# Altium PCB PCB3.PcbDoc
Units mil, origin at the board's own origin, x right, y up, seen from the top; angles counter-clockwise.
Board outline 2000 x 3000 mil, 4 copper layers (Top Layer, Layer 1, Layer 2, Bottom Layer), stack 62.192 mil thick; 42 components, 43 nets, 194 pads, 50 vias.
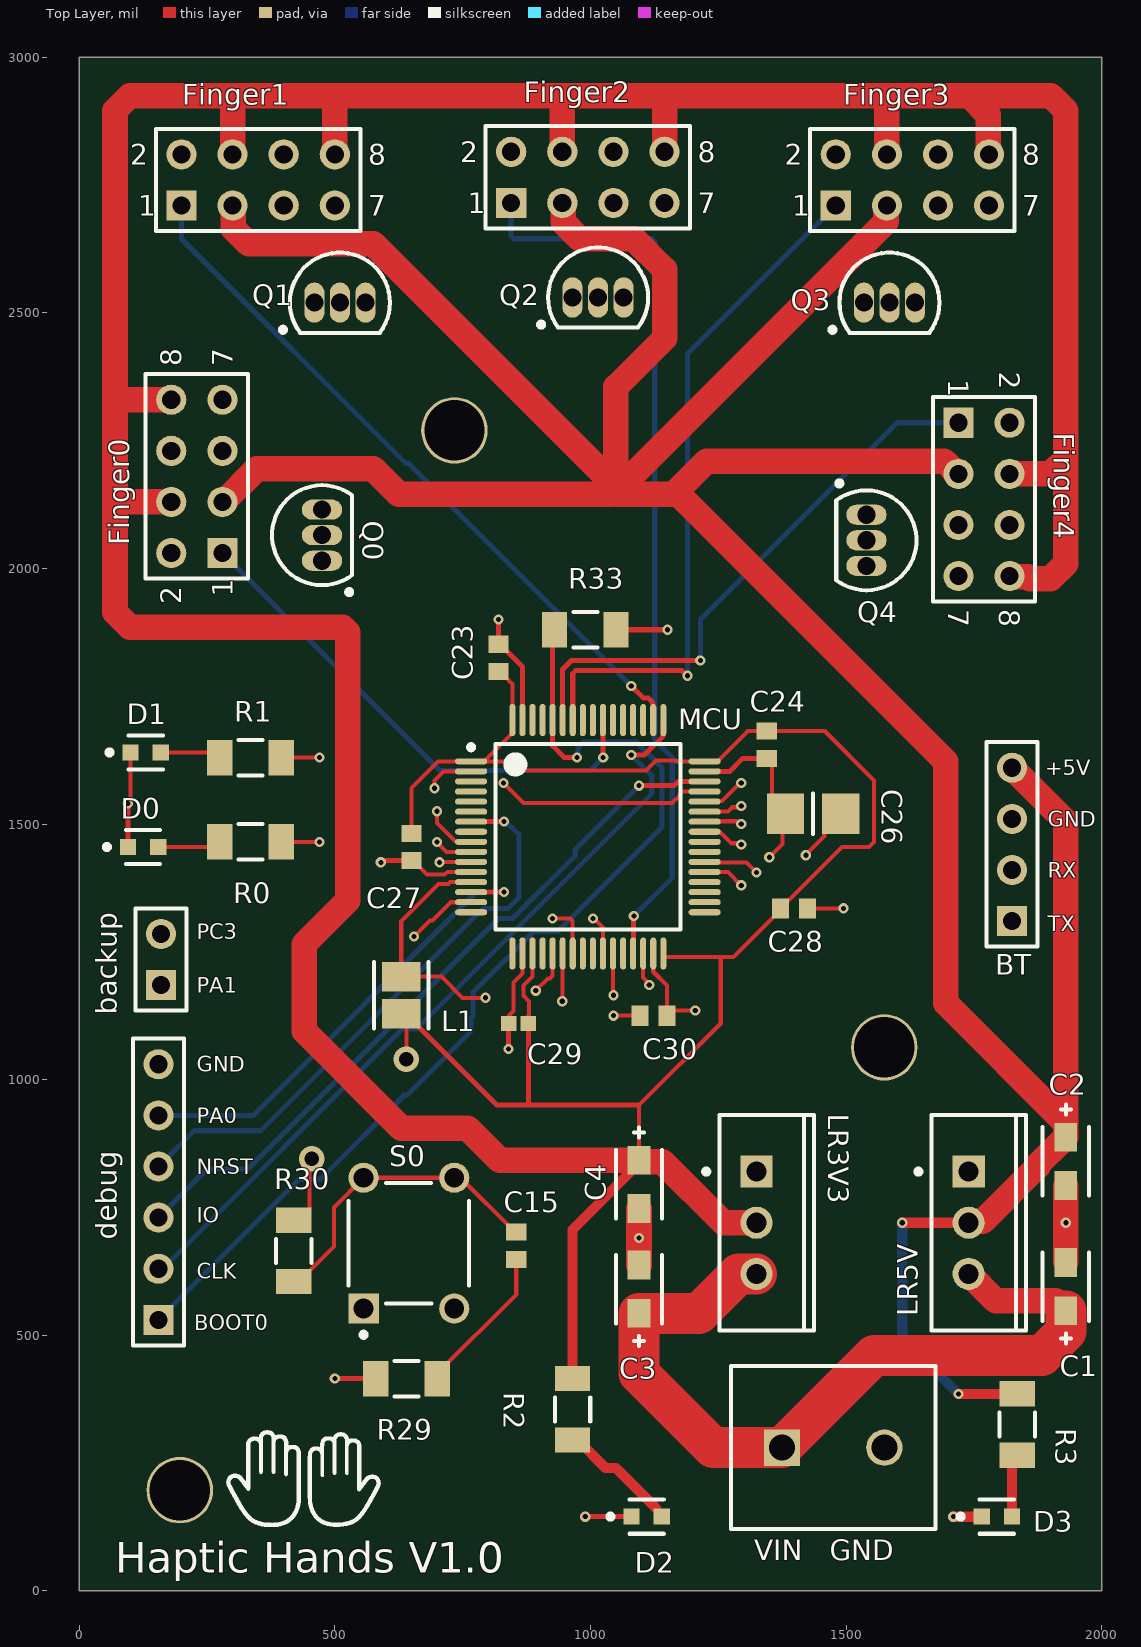
[diagram p0: Top Layer view]
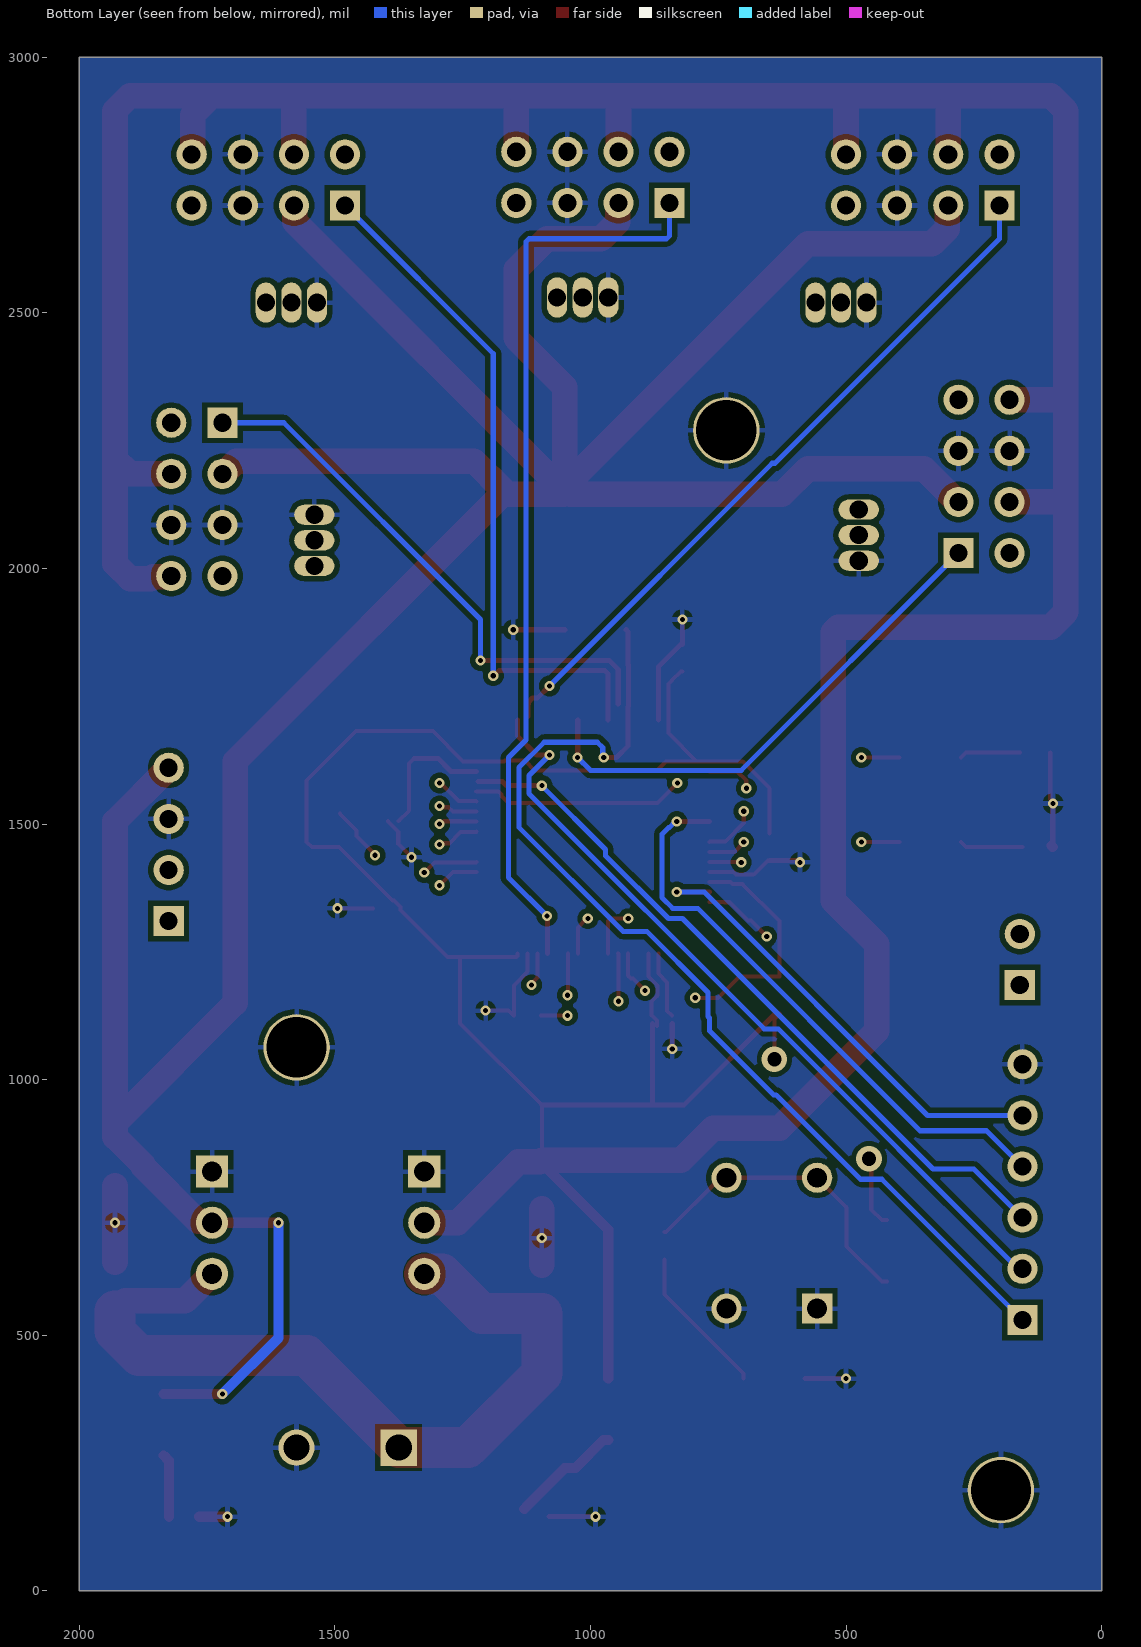
[diagram p1: Bottom Layer view, seen from below]
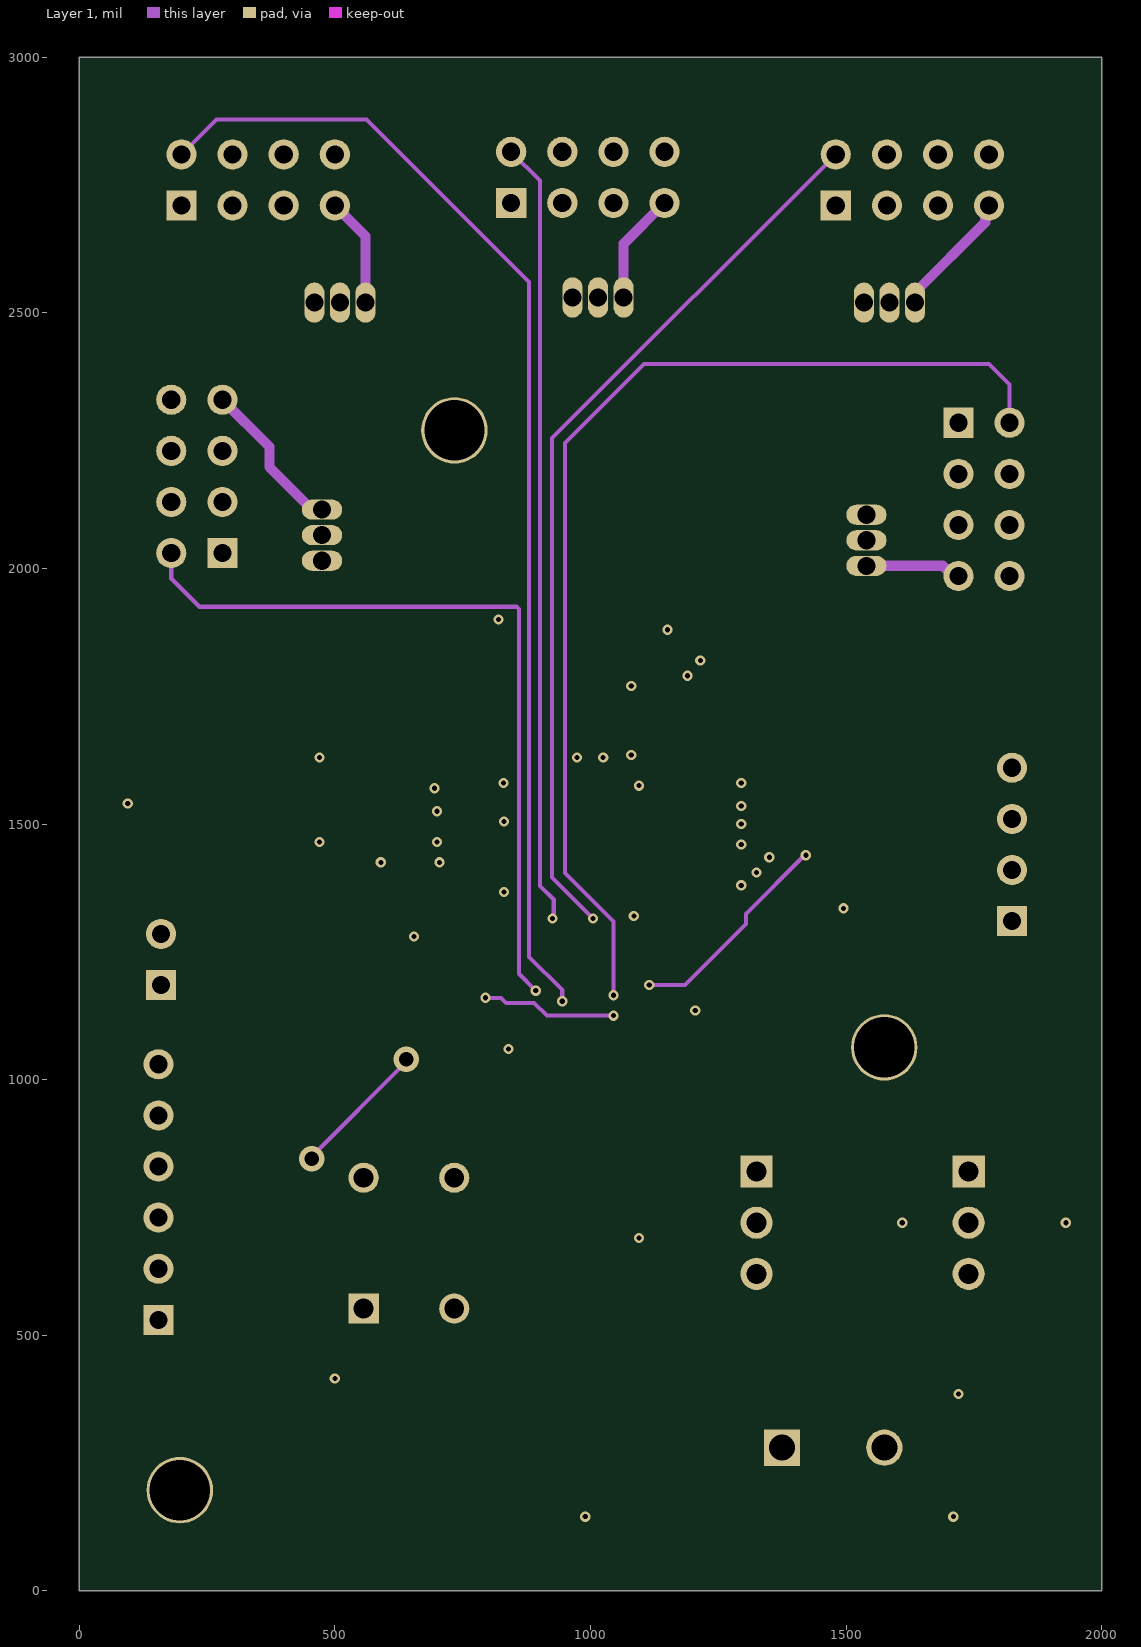
[diagram p2: Layer 1]
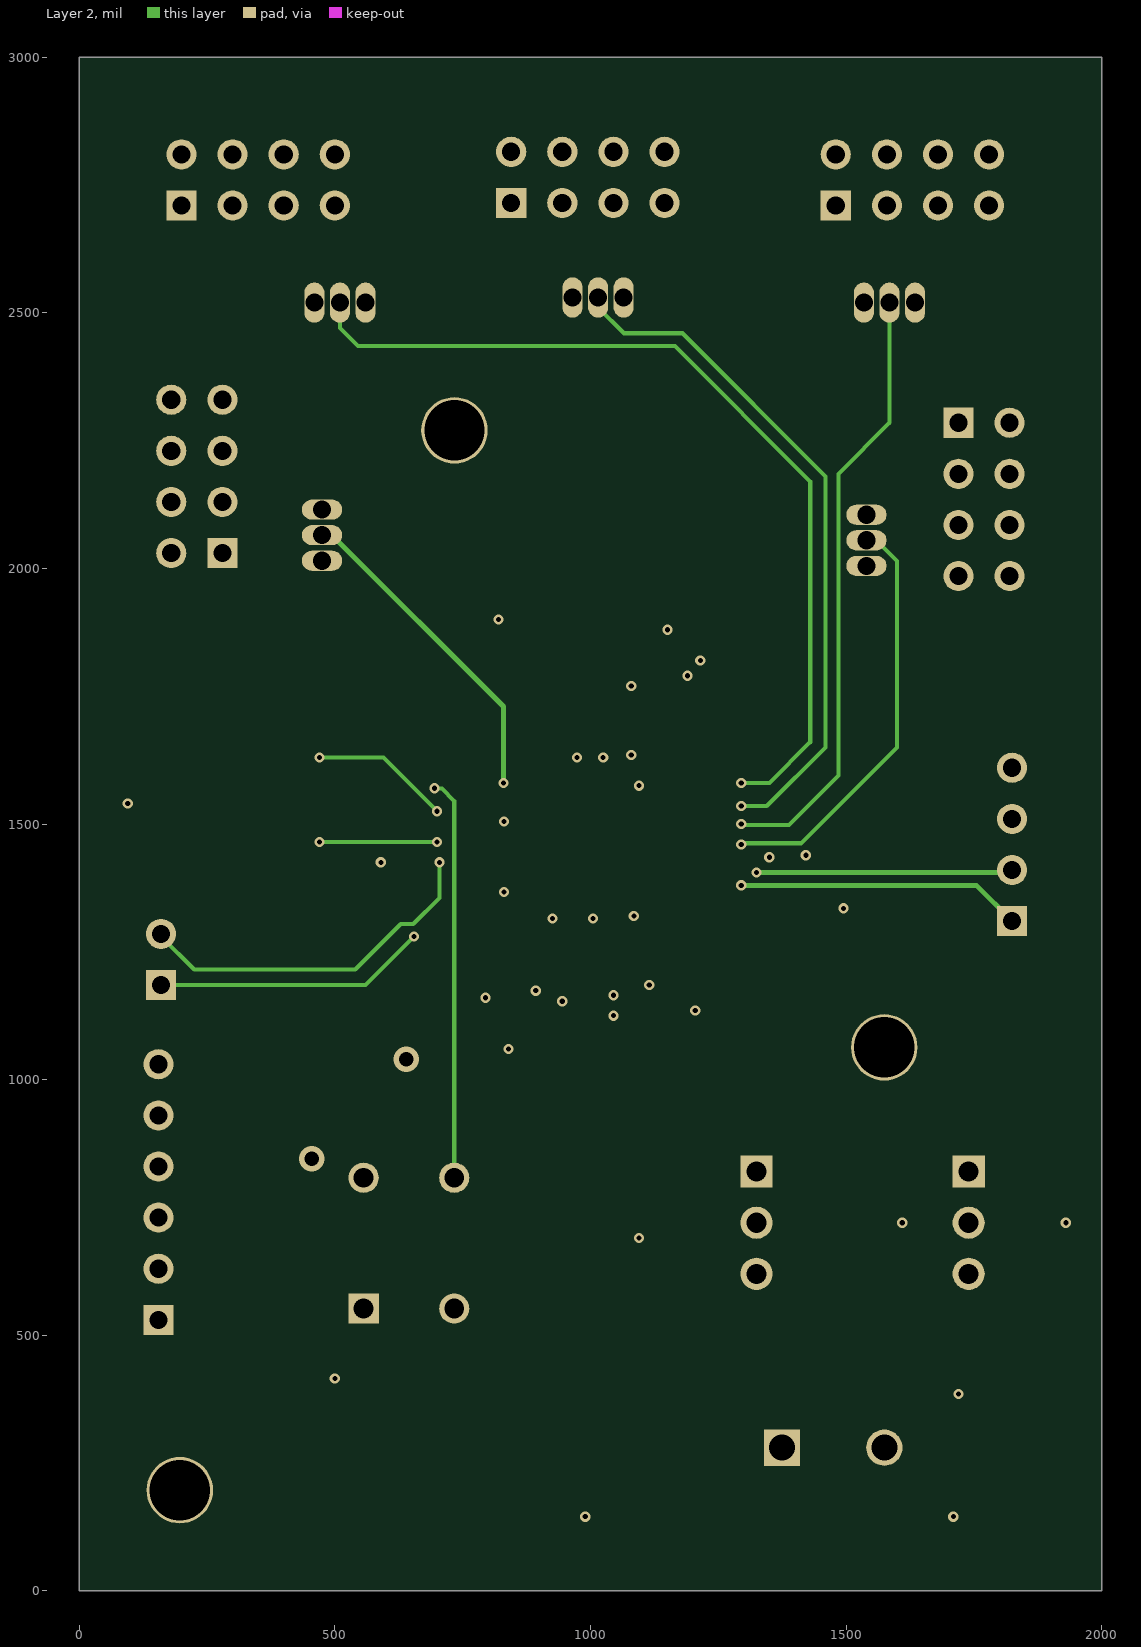
[diagram p3: Layer 2]

## Layer stack, top to bottom
Top Solder: solder mask 0.4, Solder Resist, Dk 3.5
Top Layer: signal copper 1.4
Dielectric 2: prepreg 17.018, PP-006, Dk 4.1
Layer 1: signal copper 1.378
Dielectric 1: dielectric 22.6, FR-4, Dk 4.8
Layer 2: signal copper 1.378
Dielectric 3: prepreg 17.018, PP-006, Dk 4.1
Bottom Layer: signal copper 1.4
Bottom Solder: solder mask 0.4, Solder Resist, Dk 3.5

## Board outline
0,0 2000,0 2000,3000 0,3000

## Design rules (kind name [scope] priority, off if disabled: settings)
Clearance [All] p1: gap=10 ignorepadtopadclearanceinfootprint=FALSE except(0: Arc-Hole Track-Hole SMDPad-Hole THPad-Hole Via-Hole Fill-Hole Poly-Hole Region-Hole Text-Hole; 7: Arc-SMDPad Track-SMDPad SMDPad-SMDPad)
HoleSize [All] p1: absolutevalues=TRUE maxlimit=120 minlimit=1 maxpercent=80.000 minpercent=20.000
MinimumSolderMaskSliver [All] p1: minsoldermaskwidth=2
PolygonConnect [All] p1: connectstyle=Relief reliefconductorwidth=10 reliefentries=4 polygonreliefangle="90 Angle" airgapwidth=10
RoutingVias [All] p1: holewidth=28 width=50 viastyle="Through Hole" minholewidth=10 minwidth=20 maxholewidth=28 maxwidth=50
SilkToSilkClearance [All] p1: silktosilkclearance=8
SilkToSolderMaskClearance [IsPad] p1: minsilkscreentomaskgap=7.5 clearancetoexposedcopper=TRUE
SolderMaskExpansion [All] p1: expansion=4 istentingtop=FALSE
Width [All] p1: maxlimit=80 minlimit=8 preferedwidth=10 minimp=50.000000 maximp=50.000000 favimp=50.000000
26 further rules are at their usual default settings.

## Components (designator, comment, footprint, x,y, rotation, side; value= is the part's Value field where it differs from the comment)
backup "Header 2" HDR1X2 160,1185 r90 top
BT "Header 4" HDR1X4 1825,1310 r90 top
C1 "10uF Tant" FP-T491A105K016AT-MFG 1930,595 r270 top
C2 "10uF Tant" FP-T491A105K016AT-MFG 1930,840 r90 top
C3 "10uF Tant" FP-T491A105K016AT-MFG 1095,590 r270 top
C4 "10uF Tant" FP-T491A105K016AT-MFG 1095,795 r90 top
C15 "100nF" CAPC1608X92X38NL15T08 855,675 r90 top
C23 "100nF" CAPC1608X92X38NL15T08 820,1825 r270 top
C24 "100nF" CAPC1608X92X38NL15T08 1345,1655 r90 top
C26 "4.7uF" FP-GCJ31C-0_3-IPC_A 1435.85,1520 r180 top
C27 "100nF" CAPC1608X92X38NL15T08 650,1455 r90 top
C28 "100nF" CAPC1608X92X38NL15T08 1398.43,1335 r180 top
C29 "1uF" CAPC1005X56X25ML10T15 859.29,1110 r0 top
C30 "100nF" CAPC1608X92X38NL15T08 1123.62,1125 r180 top
D0 "LTST-C190GKT" FP-LTST-C190GKT-MFG 125,1455 r0 top
D1 "LTST-C190GKT" FP-LTST-C190GKT-MFG 130,1640 r0 top
D2 "LTST-C190GKT" FP-LTST-C190GKT-MFG 1110,145 r0 top
D3 "LTST-C190GKT" FP-LTST-C190GKT-MFG 1795,145 r0 top
debug "Header 6" HDR1X6 155,530 r90 top (schematic designator debugging)
Finger0 "Header 4X2" HDR2X4 280,2030 r90 top
Finger1 "Header 4X2" HDR2X4 200,2710 r0 top
Finger2 "Header 4X2" HDR2X4 845,2715 r0 top
Finger3 "Header 4X2" HDR2X4 1480,2710 r0 top
Finger4 "Header 4X2" HDR2X4 1720,2285 r270 top
L1 "100uH" FP-LBM2016-1_6-0_2-IPC_A 630,1165 r90 top
LR3V3 "LM1084IT-3.3/NOPB" NDE0003A 1325,720 r270 top
LR5V "LM1084IT-5.0/NOPB" NDE0003A 1740,720 r270 top
MCU "STM32F411RET6" STM-LQFP64_L 995,1475 r0 top
Q0 "2N3904" TO-92A 475,2065 r0 top
Q1 "2N3904" TO-92A 510,2520 r270 top
Q2 "2N3904" TO-92A 1015,2530 r270 top
Q3 "2N3904" TO-92A 1585,2520 r270 top
Q4 "2N3904" TO-92A 1540,2055 r180 top
R0 "100" FP-CR1206-IPC_A 335,1465 r180 top
R1 "100" FP-CR1206-IPC_A 335,1630 r180 top
R2 "1K" FP-CR1206-IPC_A 965,355 r270 top
R3 "1K" FP-CR1206-IPC_A 1835,325 r270 top
R29 "100" FP-CR1206-IPC_A 640,415 r0 top
R30 "4.7K" FP-CR1206-IPC_A 420,665 r90 top
R33 "10K" FP-CR1206-IPC_A 990,1880 r0 top
S0 "1825910-6" TECO-1825910-6_V 645,680 r90 top
"VIN   GND" "1729128" PHOE-1729128-2_V 1475,280 r0 top (schematic designator power)

## Footprints (in the part's own frame and the unit in brackets; to place one, negate y for a bottom-side part, rotate by r counter-clockwise, add the part's x,y. Pads: shape width x height; smd on the part's side, far side on the other; paste and mask are expansions set on the pad)
CAPC1005X56X25ML10T15 [mm] "Chip Capacitor, 2-Leads, Body 1.00x0.50mm, IPC Low Density"
  rect 0.78x0.74 smd: 1(-0.49,0) 2(0.49,0)
  body extent -0.55,-0.3 0.55,0.3, height 0.56
CAPC1608X92X38NL15T08 [mm] "Chip Capacitor, 2-Leads, Body 1.60x0.80mm, IPC Medium Density"
  rect 0.85x1 smd: 1(-0.675,0) 2(0.675,0)
  body extent -0.87,-0.48 0.87,0.47, height 0.92
FP-CR1206-IPC_A [mil]
  rect 49.53x69.38 smd paste+0 mask+0: 1(-60.12,0) 2(60.12,0)
  silkscreen extent -24,-35 24,35, body extent -105,-54 105,54, height 10
FP-GCJ31C-0_3-IPC_A [mil]
  rect 72.96x78.9 smd paste+0 mask+0: 1(-54.15,0) 2(54.15,0)
  silkscreen extent 0,-39 0,39, body extent -110,-59 110,59, height 10
FP-LBM2016-1_6-0_2-IPC_A [mil]
  rect 57.28x75.05 smd paste+0 mask+0: 1(-36.44,0) 2(36.44,0)
  silkscreen extent -65,-53 65,53, body extent -85,-57 85,57, height 10
FP-LTST-C190GKT-MFG [mm]
  rect 0.8x0.8 smd paste+0 mask+0: 1(-0.75,0) 2(0.75,0)
  silkscreen extent -1.92,-0.85 0.85,0.85, body extent -1.25,-0.55 1.25,0.55, height 0.25
FP-T491A105K016AT-MFG [mm]
  rect 1.42x1.13 smd paste+0 mask+0: 1(-1.2,0) 2(1.2,0)
  silkscreen extent -1.7,-1.15 2.83,1.15, body extent -2.03,-1.02 2.03,1.02, height 0.25
HDR1X2 [mm] "Connector; Header; 2 Position"
  rect 1.5x1.5 hole 0.9: 1(0,0)
  round 1.5 hole 0.9: 2(2.54,0)
  silkscreen extent -1.27,-1.27 3.81,1.27
HDR1X4 [mm] "Connector; Header; 4 Position"
  rect 1.5x1.5 hole 0.9: 1(0,0)
  round 1.5 hole 0.9: 2(2.54,0) 3(5.08,0) 4(7.62,0)
  silkscreen extent -1.27,-1.27 8.89,1.27
HDR1X6 [mm] "Connector; Header; 6 Position"
  rect 1.5x1.5 hole 0.9: 1(0,0)
  round 1.5 hole 0.9: 2(2.54,0) 3(5.08,0) 4(7.62,0) 5(10.16,0) 6(12.7,0)
  silkscreen extent -1.27,-1.27 13.97,1.27
HDR2X4 [mm] "Connector; Header; 4x2 Position"
  rect 1.5x1.5 hole 0.9: 1(0,0)
  round 1.5 hole 0.9: 2(0,2.54) 3(2.54,0) 4(2.54,2.54) 5(5.08,0) 6(5.08,2.54) 7(7.62,0) 8(7.62,2.54)
  silkscreen extent -1.27,-1.27 8.89,3.81
NDE0003A [mm] "FM, 3-Leads, Body 10.7x4.7mm, Pitch 2.54mm"
  rect 1.6x1.6 hole 1: 1(-2.54,0)
  round 1.6 hole 1: 2(0,0) 3(2.54,0)
  silkscreen extent -5.35,-2.62 5.35,2.85, body extent -5.4,-1.9 5.4,2.9, height 19.4
PHOE-1729128-2_V [mm] "Receptacle, 2-Leads, Body 8.1x10.16mm, Pitch 5.08mm"
  rect 1.8x1.8 hole 1.3: 1(-2.54,0)
  round 1.8 hole 1.3: 2(2.54,0)
  silkscreen extent -5.08,-4.05 5.08,4.05, body extent -5.65,-4.05 5.08,4.05, height 10.01
STM-LQFP64_L [mm] "QFP, 64-Leads, Body 10x10mm, Pitch 0.5mm, IPC High Density"
  oval 1.6x0.3 smd: 1(-5.8,3.75) 2(-5.8,3.25) 3(-5.8,2.75) 4(-5.8,2.25) 5(-5.8,1.75) 6(-5.8,1.25) 7(-5.8,0.75) 8(-5.8,0.25) 9(-5.8,-0.25) 10(-5.8,-0.75) 11(-5.8,-1.25) 12(-5.8,-1.75) 13(-5.8,-2.25) 14(-5.8,-2.75) 15(-5.8,-3.25) 16(-5.8,-3.75) 33(5.8,-3.75) 34(5.8,-3.25) 35(5.8,-2.75) 36(5.8,-2.25) 37(5.8,-1.75) 38(5.8,-1.25) 39(5.8,-0.75) 40(5.8,-0.25) 41(5.8,0.25) 42(5.8,0.75) 43(5.8,1.25) 44(5.8,1.75) 45(5.8,2.25) 46(5.8,2.75) 47(5.8,3.25) 48(5.8,3.75)
  oval 0.3x1.6 smd: 17(-3.75,-5.8) 18(-3.25,-5.8) 19(-2.75,-5.8) 20(-2.25,-5.8) 21(-1.75,-5.8) 22(-1.25,-5.8) 23(-0.75,-5.8) 24(-0.25,-5.8) 25(0.25,-5.8) 26(0.75,-5.8) 27(1.25,-5.8) 28(1.75,-5.8) 29(2.25,-5.8) 30(2.75,-5.8) 31(3.25,-5.8) 32(3.75,-5.8) 49(3.75,5.8) 50(3.25,5.8) 51(2.75,5.8) 52(2.25,5.8) 53(1.75,5.8) 54(1.25,5.8) 55(0.75,5.8) 56(0.25,5.8) 57(-0.25,5.8) 58(-0.75,5.8) 59(-1.25,5.8) 60(-1.75,5.8) 61(-2.25,5.8) 62(-2.75,5.8) 63(-3.25,5.8) 64(-3.75,5.8)
  silkscreen extent -5.92,-4.6 4.6,4.6, body extent -5,-5 5,5, height 1.6
TECO-1825910-6_V [mm] "Switch, 4-Leads, Body 5.99x5.99mm"
  rect 1.5x1.5 hole 0.99: 1(-3.25,2.25)
  round 1.5 hole 0.99: 2(3.25,2.25) 3(-3.25,-2.25) 4(3.25,-2.25)
  silkscreen extent -4.67,-2.99 2.99,3, body extent -3,-2.99 2.99,3, height 5
TO-92A [mm] "TO, Flat Index; 3 In-Line, Axial Leads; Body Dia. 4.5mm; Leads 0.51 x 0.48 mm (max)"
  oval 2x1 hole 0.9: 1(0,-1.27) 2(0,0) 3(0,1.27)
  silkscreen extent -2.48,-2.95 1.5,2.48, body extent -2.48,-2.5 1.5,2.5, height 6.86

## Part data
backup: "Header, 2-Pin", LatestRevisionDate=17-Jul-2002, LatestRevisionNote="Re-released for DXP Platform.", Publisher="Altium Limited"
BT: "Header, 4-Pin", LatestRevisionDate=17-Jul-2002, LatestRevisionNote="Re-released for DXP Platform.", Publisher="Altium Limited"
C1 C2 C3 C4: library part CMP-2000-07186-2, "10uF TANTALUM / T494A106K016AT", Capacitance=1uF, Case Code (Imperial)=1206, Case Code (Metric)=3216, Dielectric Material=Tantalum, ESR (Equivalent Series Resistance)=10R, Leakage Current=500nA, Max Operating Temperature=125°C, Min Operating Temperature=-55°C, Package Quantity=1, Ripple Current=87mA, Tolerance=20%, Voltage=16V, Case/Package=1206, Depth=1.6mm, Dissipation Factor=4%, Features="General Purpose", Height=1.6mm, Height - Seated (Max)=0.071inch, Lead Free="Lead Free", Length=3.2mm, Life (Hours)=2000Hour, Mount="Surface Mount", Number of Pins=2, Packaging="Tape and Reel", Polarity=Polar, REACH SVHC="No SVHC", Termination=SMD/SMT, Voltage Rating=16V, Voltage Rating (DC)=16V, Width=1.6mm
C15 C23 C24 C27 C28 C30: library part CMP-2006-01975-1, Manufacturer=Vitramon, Part Number=VJ0603Y104KXAAC
C26: library part CMP-06035-047309-1, "Cap Ceramic 4.7uF 25V X7R 10% Pad SMD 1206 Soft Termination  +125°C Automotive T/R", Case Code (Imperial)=1206, Case Code (Metric)=3216, Dielectric=X7R, Max Operating Temperature=125°C, Min Operating Temperature=-55°C, Package Quantity=2000, Ratings=AEC-Q200, Tolerance=10%, Voltage Rating=25V, Capacitance=4.7uF, Case/Package=1206, Depth=1.6mm, Features="Soft Termination", Lead Free="Lead Free", Length=0.126inch, Mount="Surface Mount", Packaging="Tape and Reel", Termination=SMD/SMT, Thickness=0.075inch, Voltage Rating (DC)=25V, Width=0.063inch
C29: library part CMP-2008-02844-1, Manufacturer="AVX Interconnect / Elco", Part Number=0402YD105KAT2A
D0 D1 D2 D3: library part CMP-22017-000005-2, "LED GREEN CLEAR CHIP SMD", Case Code (Imperial)=0603, Case Code (Metric)=1608, Color=Green, Forward Current=30mA, Forward Voltage=2.1V, Lens Color=Colorless, Max Operating Temperature=85°C, Min Operating Temperature=-55°C, Package Quantity=1, Power Dissipation=100mW, Reverse Voltage=5V, Test Current=10mA, Voltage=2V, Case/Package=0603, Depth=0.8mm, Dominant Wavelength=569nm, Height=0.8mm, Illumination Color=Green, Lead Free="Lead Free", Length=1.6mm, Lens Style=Clear, Lens Transparency=Clear, Luminous Intensity=6mcd, Mount="Surface Mount", Number of Elements=1, Number of LEDs=1, Number of Pins=2, Packaging="Tape and Reel", Power Rating=100mW, Radiation Hardening=No, Viewing Angle=130°, Wavelength=565nm, Width=0.8mm
debug: "Header, 6-Pin", LatestRevisionDate=17-Jul-2002, LatestRevisionNote="Re-released for DXP Platform.", Publisher="Altium Limited"
Finger0 Finger1 Finger2 Finger3 Finger4: "Header, 4-Pin, Dual row", LatestRevisionDate=17-Jul-2002, LatestRevisionNote="Re-released for DXP Platform.", Publisher="Altium Limited"
L1: library part CMP-14484-000443-1, "SMD Inductors 100uH ±5% 0.08A 10.4Ω 0806"
LR3V3: library part CMP-0062-02533-3, "5A Low Dropout Positive Regulators, 3-pin TO-220, Pb-Free", Manufacturer="Texas Instruments", PackageTopMarking=NSUZXYTTE#*LM1084*IT-3.3, PowerWise=N, ComponentLink1Description="Datasheet URL", ComponentLink1URL=http://www.ti.com/general/docs/lit/getliterature.tsp?genericPartNumber=LM1084&fileType=pdf, CompType="LDO IC", PackageDescription="TO-220, Molded, 3 Lead, Straight", PackageReference=NDE0003A, PinCount=3, RoHS=Y
LR5V: library part CMP-0062-02537-3, "5A Low Dropout Positive Regulators, 3-pin TO-220, Pb-Free", Manufacturer="Texas Instruments", PackageTopMarking=NSUZXYTTE#*LM1084*IT-5.0, PowerWise=N, ComponentLink1Description="Datasheet URL", ComponentLink1URL=http://www.ti.com/general/docs/lit/getliterature.tsp?genericPartNumber=LM1084&fileType=pdf, CompType="LDO IC", PackageDescription="TO-220, Molded, 3 Lead, Straight", PackageReference=NDE0003A, PinCount=3, RoHS=Y
MCU: library part CMP-0243-00169-1, "ARM Cortex-M4 32-bit MCU+FPU, 512 KB Flash, 128 KB RAM, 50 I/Os, 64-Pin LQFP, -40 to 85 degC, Tray", I/Os (High Current)=50, Operating Frequency(F) (Processor speed) (MHz)=100, Package Description=LQFP64, Package Reference="64-Pin Low-profile Quad Flat Package, Body 10 x 10 mm, Pitch 0.5 mm", Supply Voltage(Vcc) min (V)=1.7, ComponentLink1Description="Manufacturer URL", ComponentLink1URL=http://www.st.com/, ComponentLink2Description=Datasheet, ComponentLink2URL=http://www.st.com/st-web-ui/static/active/en/resource/technical/document/datasheet/DM00115249.pdf, Core="ARM Cortex-M4", DatasheetVersion="Rev. 6", FLASH Size (Prog) (kB)=512, Internal RAM Size (kB)=128, Mounting Technology="Surface Mount", Packing=Tray
Q0 Q1 Q2 Q3 Q4: "NPN General Purpose Amplifier", ComponentLink1Description="Manufacturer Link", ComponentLink1URL=http://www.fairchildsemi.com/, ComponentLink2Description=Datasheet, ComponentLink2URL=http://www.fairchildsemi.com/ds/2N%2F2N3904.pdf, DatasheetVersion=1997, LatestRevisionDate=15-Jan-2003, LatestRevisionNote="PCB Footprint 'BCY-W3/D4.7' replaced", PackageDescription="TO, Flat Index; 3 In-Line, Axial Leads; Body Dia. 4.5mm; Leads 0.51 x 0.48 mm (max)", PackageReference=TO-92A, PackageVersion=Sep-1998, Published=8-Jun-2000, Publisher="Altium Limited"
R0 R1 R2 R3 R29 R30 R33: library part CMP-07231-002641-1, "Thick Film Chip Resistors 1206 1kΩ 0.25W 1% 100ppm/°C", Case Code (Imperial)=1206, Case Code (Metric)=3216, Max Operating Temperature=155°C, Max Power Dissipation=250mW, Min Operating Temperature=-55°C, Package Quantity=1, Resistance=1kR, Temperature Coefficient=100ppm/°C, Tolerance=1%, Voltage Rating=200V, Case/Package=1206, Composition="Thick Film", Contact Plating=Tin, Depth=1.6mm, Features="Moisture Resistant", Height=0.6mm, Length=3.2mm, Military Standard=Not, Mount="Surface Mount", Number of Pins=2, Number of Terminations=2, Packaging="Tape and Reel", Power Rating=250mW, Radiation Hardening=No, REACH SVHC="No SVHC", Termination=SMD/SMT, Thickness=610um, Voltage Rating (DC)=200V, Width=1.6mm
S0: library part CMP-1684-00021-1, "Tact Switch, SPST-NO, 0.05 A, -35 to 85 degC, 4-Pin THD, RoHS, Bulk", Actuator Color=Black, Contact Rating @ Voltage=0.05A@24VDC, Dielectric Strength=500VAC, Manufacturer="TE Connectivity", Maximum AC Voltage Rating=N/A, Maximum Contact Resistance=100mOhm, Maximum DC Voltage Rating=24V, Minimum Insulation Resistance=100MOhm, Operating Temperature=-35to85C, Package Description="4-Pin Through Hole Device, Body 5.99 x 5.99 mm, Pitch 6.5 mm", Package Reference=THD, Actuator Length=1.4mm, Actuator Material=PolybutyleneTerephthalate, Actuator Style=RoundButton, Base Material=N/A, Body Orientation=Straight, Bushing Type=Unthreaded, Contact Material=CopperAlloy, Contact Plating=Silver, Datasheet URL=http://www.te.com/commerce/DocumentDelivery/DDEController?Action=showdoc&DocId=Customer+Drawing%7F1825910%7FC9%7Fpdf%7FEnglish%7FENG_CD_1825910_C9.pdf%7F1825910-6, Datasheet Version="Rev. C9", Dimension=5.99x5mm, Electrical Life=100000Cycles, Family=1825910, Function=MomentaryContact, Housing Material=N/A, Illumination=N/R, Manufacturer URL=http://www.te.com, Mechanical Life=100000Cycles, Mounting=ThroughHole, Packaging=N/A, Part No=1825910-6, Pole Throw Configuration=SPST, Product Weight=N/A, RoHS=Yes, Seal Description=N/A, Seal Location=N/A, Switch Configuration=OFF(ON), Terminal Type=PCPins, Thread Size=N/R
"VIN   GND": library part CMP-2000-05815-1, "PCB Terminal Block, 13.5 A, 400 V, 2-Pin THD, RoHS, Bulk", Current Rating=13500mA, Manufacturer="Phoenix Contact", Package Description="2-Pin Through Hole Device, Body 8.1 x 10.16 mm, Pitch 5.08 mm", Package Reference=1729128-2, Package Version=03/2015, Voltage Rating=400V, Datasheet URL=https://datasheet.ciiva.com/16046/1729128-16046181.pdf, Datasheet Version=12/2013, Manufacturer URL=http://www.phoenixcontact.com/, Mounting Technology=ThroughHole, No. of Positions=2, No. of Rows=1, Orientation=Horizontal, Package URL=https://www.phoenixcontact.com/online/portal/pi/pxc/product_detail_page/!ut/p/b1/3VdJjqNKFDxLH8AFycySyWY2ozFsEPOMMQaDOX1XedGL_1Vdm5YXJleknhSKeBkvI6EA8ncAo3AYoDhBQGco6KN7VURTdemj9us_IEKEZo_YHiPAEWEFmDGOHMORkqKYCORBZxgL7ZoaZYcbFFUZ3fqxSY6GOuxydWUuHqz1ynmMFygu583Bob0Ewr6Sd_l-5m-kAueHiB0jpRwZwe58wwtkpxtMYd_LmGcDRU02dRNEyWt6Y2ti5pSyJ_reIkzIulrqApdnbT11V5jnCKbYNCvhEM1MCpPByat_X379-iThf08CI5GfOPqfBeS3BRoBOdD55AKVv0iLwCMq-2BrzXWSGRH7pUGD9uwXQjiph3xL0DKQwdGa0JImiIOmBNOestqgwTHSSs2oOep-78apyXQBvNi8ZLaFjvjWvcaUEBu0MC6Wbe-d6mB0FAebo2lUWinqYaZs5DAYzV0RP9yitUjnGJ0iI9xhZkT42OCQNUJJhkgWINNQLP2JFP6OpMg3JCVg70jqHT0lvKOnhHf0lPuOnnLf0VPuWx6_dxwUIvwk5WMkT0kLL1mh61l2yZVSzG3pYV_bqo-mj6uMKwKwdnnW8Jh5RTOJzMOA5c-eJDaZQw4mTMPH02PvS_ZAqNVjVTo2WyYLkwH_KU1mmmG5kjRhDqPXLwwVHvVOjCM60-fpXvTDfMGW1PVFVS1r4e4yVDk4ZdNbkUHvqPqQSeian4UD39fNKmachqdJ1NJbyk8rXT9mXTvPk3oE5meulKGgiruPJek-4I9hTT6G8ZLOyRSm2RRVbThERQad5OS28hdt4YW4vG0stgYYzsWsK4_7y6DZMjJSCqri1kyiZR5vD7pwIrNR7QwPHTcLTI5qT7eRlpHrdGiupYlqQDJ7zy_CND8fWWBoLRXxk1RVcXiBQwbTD4Xi7KL-FuO94t9xaqweXzH, Packing=Bulk, PartNumber=1729128, Pitch=5.08mm, RoHS=TRUE

## Free pads (board coordinates)
  round 130 hole 118: 9(196.85,196.85) 10(1574.8,1062.99) 11(734.07,2270)

## Via types
v1: diameter 20, hole 10, Top Layer to Bottom Layer, 48 vias
v2: diameter 50, hole 28, Top Layer to Bottom Layer, 2 vias

## Nets (pads, with @x,y where several pads share a name; then routed paths per layer and width w, separated by ;. In a path a pad name is that pad's centre, name@x,y a point inside that pad or via, vN(x,y) a via of type N, cw(c..) or ccw(c..) an arc to the next point about the centre after c; other vN are vias at no path point)
3.3V: C4.2 C23.2 C24.2 C27.2 C28.2 C29.2 Finger0.4 Finger0.8 Finger1.4 Finger1.8 Finger2.4 Finger2.8 Finger3.4 Finger3.8 Finger4.4 Finger4.8 L1.1 LR3V3.2 MCU.1 MCU.19 MCU.32 MCU.48 MCU.64 R2.1 R30.2 | length 11504.6
  Top Layer w8: R30.2 429.92,725.12 450.69,745.88 450.69,835.24 455,839.56 v2(455,845) ; L1.1 640,1118.56 v2(640,1040) ; C27.2 650,1570 701.91,1621.91 740.33,1621.91 741.06,1622.64 792.24,1622.64 847.36,1677.76 MCU.64 847.36,1773.7 841,1780.06 841,1780.38 822.95,1798.43 C23.2 ; MCU.1@794.61,1622.64 852.36,1622.64 870,1605 1108.94,1605 1127.94,1624 1167.35,1624 1168.71,1622.64 MCU.48 1248.94,1622.64 1307.87,1681.57 C24.2 1458.43,1681.57 1555,1585 1555,1465 1545,1455 1491.85,1455 1387.54,1350.69 1384.58,1350.69 1371.85,1337.95 C28.2 1371.85,1332.05 1279.5,1239.7 1255,1239.7 ; C29.2@870.06,1104.63 870.06,1115.77 880.24,1125.95 880.24,1152.85 869.03,1164.06 869.03,1183.94 886.73,1201.64 MCU.19 ; C4.2@1095,842.44 1095,950 1255,1110 1255,1239.7 ; MCU.32 1142.64,1241.46 1144.4,1239.7 1255,1239.7
  Top Layer w10: L1.1 638.88,1128.56 817.44,950 880,950 ; C29.2 878.58,951.42 880,950 ; 1095,950 880,950
  Top Layer w20: R2.1 965,706.54 1095,836.54 1095,842.05 C4.2
  Top Layer w50: Finger0.4 70,2130 ; Finger0.8 75,2330 70,2335 ; Finger1.4 300,2915 290,2925 ; Finger1.8 500,2920 495,2925 ; Finger2.4 945,2920 940,2925 ; C4.2@1095,842.05 1097.76,839.29 1140.71,839.29 1259.7,720.3 1324.7,720.3 LR3V3.2 ; C4.2 822.76,842.24 760,905 630,905 440,1095 440,1265 525,1350 525,1875 515,1885 99.29,1885 70,1914.29 70,2130 ; Finger2.8 1145,2920 1140,2925 ; Finger3.4 1580,2915 1570,2925 ; Finger3.8 1778.27,2811.73 1778.27,2887.44 1740.71,2925 ; Finger4.8 1821.73,1983.27 1856.02,1983.27 1859.29,1980 1900.71,1980 1930,2009.29 1930,2214.29 ; Finger4.4 1900.71,2185 1930,2214.29 ; 70,2130 70,2335 ; 70,2335 70,2895.71 99.29,2925 290,2925 ; 290,2925 495,2925 ; 495,2925 940,2925 ; 940,2925 1140,2925 ; 1140,2925 1570,2925 ; 1570,2925 1740.71,2925 ; 1740.71,2925 1900.71,2925 1930,2895.71 1930,2214.29
  Layer 1 w8: v2(455,845) 455,850 640,1035 v2(640,1040)
7.2V: "VIN   GND.1" C1.2 C3.2 LR3V3.3 LR5V.3 | length 1629.7
  Top Layer w50: LR5V.3 1792.71,567.29 1910.46,567.29 1927.05,550.71 1927.24,550.71 1930,547.95 C1.2
  Top Layer w80: LR3V3.3 1290,620 1212.76,542.76 C3.2 1095,425 1240,280 1375,280 1555,460 1883.14,460 1930,506.86 C1.2
+5: BT.4 C2.2 Finger0.3 Finger1.3 Finger2.3 Finger3.3 Finger4.3 LR5V.2 R3.1 | length 7240.6
  Top Layer w10: v1(1720,385) v1@1720,385.12
  Top Layer w20: v1(1610,720) LR5V.2 ; v1@1720,385.12 R3.1
  Top Layer w50: Finger0.3 282.45,2130 347.45,2195 575,2195 625,2145 1040,2145 ; Finger1.3 301.73,2708.27 301.73,2664.67 331.4,2635 575.16,2635 1042.74,2167.42 1050,2160.16 ; Finger2.3 946.73,2713.27 946.73,2677.08 978.82,2645 1085,2645 1145,2585 1145,2450 1050,2355 1050,2160.16 ; 1048.48,2155.55 1050,2160.16 ; 1048.54,2148.54 1578.27,2678.27 1578.27,2708.27 Finger3.3@1579.51,2709.51 ; 1052.07,2145 1172.5,2145 ; Finger4.3 1717.55,2185 1692.55,2210 1227.5,2210 1167.5,2150 1695,1622.5 1695,1149.69 C2.2@1930,914.69 ; LR5V.2 1742.49,722.49 1767.49,722.49 1875.76,830.76 1875.76,833.96 C2.2@1924.29,882.5 ; BT.4 1930,1505 C2.2@1930,914.69 ; C2.2 C2.2@1930,914.69
  Bottom Layer w20: v1(1610,720) 1610,495 v1(1720,385)
AGND: "VIN   GND.2" BT.3 C1.1 C2.1 C3.1 C4.1 C23.1 C24.1 C26.2 C27.1 C28.1 C29.1 C30.1 D0.1 D1.1 D2.1 D3.1 debug.6 Finger0.5 Finger0.6 Finger1.5 Finger1.6 Finger2.5 Finger2.6 Finger3.5 Finger3.6 Finger4.5 Finger4.6 LR3V3.1 LR5V.1 MCU.12 MCU.18 MCU.31 MCU.47 MCU.63 pad.9 pad.10 pad.11 Q0.1 Q1.1 Q2.1 Q3.1 Q4.1 R29.1 R33.2 S0.1 S0.3 | length 1990
  Top Layer w8: v1(95,1540) 95,1543.25 100.47,1548.72 D1.1 ; C27.1 652.95,1428.43 680.38,1401 714.94,1401 720.04,1406.1 MCU.12 ; 840.71,1125 849.94,1134.23 849.94,1190.3 867.05,1207.41 MCU.18 ; MCU.31 1122.95,1210.99 1149.79,1184.15 C30.1@1149.79,1125.4 ; C30.1 1160.2,1135 v1(1205,1135) ; MCU.47@1222.62,1602.22 MCU.47 ; C24.1 1355,1618.43 1355,1525.85 C26.2@1375,1505.85 ; v1(1350,1435) 1375.85,1460.85 1375.85,1484.55 1395.85,1504.55 C26.2@1395.85,1505.85 ; C28.1 v1(1495,1335)
  Top Layer w10: v1(95,1540) 95.47,1539.53 D0.1 ; v1(500,415) R29.1 ; v1(590,1425) 592.71,1425 596.13,1428.43 C27.1 ; v1(820,1900) C23.1 822.95,1851.57 867.05,1807.48 MCU.63 ; v1(840,1060) C29.1 ; v1(990,145) D2.1 ; R33.2 v1(1150.92,1880) ; MCU.47 1272.6,1602.95 1298.07,1628.43 C24.1
  Top Layer w20: D0.1 D0.1@97.97,1457.5 ; v1(1710,145) D3.1
  Top Layer w50: C3.1 v1(1095,690) C4.1 ; C1.1 v1(1930,720) C2.1
AVDD: C30.2 L1.2 MCU.13 | length 775.6
  Top Layer w8: MCU.13 739.52,1386.42 739.3,1386.2 725.59,1386.2 722.4,1383 703,1383 630,1310 L1.2 708.56,1201.44 750,1160 v1(795,1160) ; v1(1045,1125) C30.2
  Layer 1 w8: v1(795,1160) 825,1160 835,1150 890,1150 915,1125 v1(1045,1125)
BOOT0: debug.1 MCU.60 R33.1 | length 2038.9
  Top Layer w10: R33.1 926.1,1876.22 926.1,1811.34 925.47,1810.71 925.47,1730.06 926.1,1729.43 926.1,1652.9 949,1630 v1(974,1630)
  Bottom Layer w10: debug.1 430,805 471.57,805 636.57,970 641.57,970 766.68,1095.11 766.68,1120.33 770,1123.64 770,1170.36 889.64,1290 936.36,1290 1140,1493.64 1140,1610.36 1090.36,1660 986.43,1660 975.91,1649.49 975.91,1631.91 v1(974,1630)
NetC15_1: C15.1 R29.2 | length 297.6
  Top Layer w8: R29.2 700.12,424.92 855,579.8 C15.1
NetC26_1: C26.1 MCU.30 | length 599.1
  Top Layer w8: MCU.30 1103.27,1199.98 1115,1188.25 v1(1115,1185) ; v1(1421.44,1438.9) 1421.44,1440.59 1457.52,1476.67 1457.52,1487.52 C26.1
  Layer 1 w8: v1(1115,1185) 1185,1185 1304.7,1304.7 1304.7,1324.35 1419.25,1438.9 v1(1421.44,1438.9)
NetD0_2: D0.2 R0.2 | length 124.5
  Top Layer w8: D0.2 264.88,1455 R0.2
NetD1_2: D1.2 R1.2 | length 119.5
  Top Layer w8: D1.2 264.88,1640 R1.2
NetD2_2: D2.2 R2.2 | length 220.8
  Top Layer w20: R2.2 974.92,294.88 1029.8,240 1050.25,240 1123.78,166.47 1123.78,165.75 D2.2@1129.53,160
NetD3_2: D3.2 R3.2 | length 124.2
  Top Layer w20: D3.2 1824.53,254.41 R3.2
NetFinger0_7: Finger0.7 Q0.3 | length 307.3
  Layer 1 w20: Finger0.7 372.18,2237.82 372.18,2198.13 455.32,2115 Q0.3
NetFinger1_7: Finger1.7 Q1.3 | length 214.9
  Layer 1 w20: Finger1.7 560,2650 Q1.3
NetFinger2_7: Finger2.7 Q2.3 | length 218.1
  Layer 1 w20: Q2.3 1065,2635 Finger2.7
NetFinger3_7: Finger3.7 Q3.3 | length 250.1
  Layer 1 w20: Q3.3 1635,2539.68 1772.53,2677.21 1772.53,2702.53 Finger3.7
NetFinger4_7: Finger4.7 Q4.3 | length 188.3
  Layer 1 w20: Q4.3 1689.43,2005 1709.43,1985 Finger4.7
NRST: debug.4 MCU.7 | length 1150.9
  Top Layer w10: MCU.7 766.89,1504.76 830.76,1504.76 v1(831,1505)
  Bottom Layer w10: debug.4 225,900 355,900 790,1335 839.14,1335 860,1355.86 860,1480 847.14,1492.86 845.85,1492.86 833.71,1505 v1(831,1505)
PA0: debug.5 MCU.14 | length 921.4
  Top Layer w10: MCU.14 766.77,1366.85 830.88,1366.85 v1(831,1366.97)
  Bottom Layer w10: debug.5 340.36,930 777.33,1366.97 v1(831,1366.97)
PA1: backup.1 MCU.15 | length 673.8
  Top Layer w8: v1(655,1280) 686,1311 691.46,1311 727.46,1347 737.31,1347 737.36,1347.05 MCU.15
  Layer 2 w8: backup.1 560,1185 v1(655,1280)
PA5_pot0: Finger0.2 MCU.21 | length 1603.4
  Top Layer w8: v1(893.03,1174) 917.03,1198 920.94,1198 926.1,1203.16 MCU.21
  Layer 1 w8: Finger0.2 180,1980 235,1925 855.31,1925 860,1920.31 860,1207.03 v1(893.03,1174)
PA6_pot1: Finger1.2 MCU.22 | length 2367.6
  Top Layer w8: v1(945,1153.25) 945.39,1153.64 945.39,1246.26 MCU.22
  Layer 1 w8: Finger1.2 268.32,2878.32 561.68,2878.32 880,2560 880,1240 945,1175 v1(945,1153.25)
PA7_pot2: Finger2.2 MCU.23 | length 1640.4
  Top Layer w8: v1(926,1315) 960.55,1315 965.24,1310.31 965.24,1246.89 MCU.23
  Layer 1 w8: Finger2.2 901.47,2758.53 901.47,1379.03 928.3,1352.2 928.3,1317.3 v1(926,1315)
PA8_vib4: MCU.41 Q4.2 | length 907
  Top Layer w8: MCU.41 1224.08,1484.11 1253.89,1484.11 1275.71,1462.3 1292.7,1462.3 v1(1295,1460)
  Layer 2 w8: v1(1295,1460) 1297.3,1462.3 1412.3,1462.3 1600,1650 1600,2014.68 1559.68,2055 Q4.2
PA9_vib3: MCU.42 Q3.2 | length 1270.8
  Top Layer w8: MCU.42 1224.08,1505.26 1252.36,1505.26 1252.47,1505.37 1286.39,1505.37 1291.23,1500.53 v1@1294.47,1500.53
  Layer 2 w8: v1(1295,1500) 1296.9,1498.1 1388.1,1498.1 1485,1595 1485,2185 1585,2285 1585,2310 Q3.2
PA10_vib2: MCU.43 Q2.2 | length 1439.9
  Top Layer w8: Q2.2@1015,2510.32 Q2.2 ; MCU.43 1223.57,1524.43 1269,1524.43 1277.27,1532.7 1292.7,1532.7 v1(1295,1535)
  Layer 2 w8: Q2.2 1015,2510.32 1065.32,2460 1180,2460 1460,2180 1460,1650 1345,1535 v1(1295,1535)
PA11_vib1: MCU.44 Q1.2 | length 1859.2
  Top Layer w8: MCU.44 1224.08,1544.63 1257.56,1544.63 1292.93,1580 v1(1295,1580)
  Layer 2 w8: Q1.2 510,2470 545,2435 1165.31,2435 1430,2170.31 1430,1660 1350,1580 v1(1295,1580)
PA12_vib0: MCU.45 Q0.2 | length 1064
  Top Layer w8: v1(830,1580) 869,1541 1159.94,1541 1174,1555.06 1174,1557.73 1179.85,1563.58 MCU.45
  Layer 2 w10: Q0.2 494.68,2065 830,1729.68 v1(830,1580)
PA15_servo1: Finger1.1 MCU.50 | length 1391.4
  Top Layer w10: v1(1080,1770) 1103.16,1746.84 1113.16,1746.84 1121.17,1738.83 1121.17,1735 1122.61,1733.57 1122.61,1710.31 MCU.50@1122.29,1710
  Bottom Layer w10: Finger1.1 200,2644.37 638.73,2205.64 644.36,2205.64 v1(1080,1770)
PB0_pot3: Finger3.2 MCU.26 | length 1835.8
  Top Layer w8: v1(1005,1315) 1007.29,1315 1024.53,1297.76 MCU.26
  Layer 1 w8: v1(1005,1315) 925,1395 925,2255 Finger3.2
PB1_pot4: Finger4.2 MCU.27 | length 2227.1
  Top Layer w8: MCU.27 1044.21,1165.79 v1(1045,1165)
  Layer 1 w8: v1(1045,1165) 1045,1308.94 950,1403.94 950,2245 1105,2400 1780,2400 1820,2360 Finger4.2
PB3_servo0: Finger0.1 MCU.55 | length 1004.9
  Top Layer w10: MCU.55 1024.76,1703.11 1024.76,1630.24 v1(1025,1630)
  Bottom Layer w10: Finger0.1 705,1605 1000,1605 v1(1025,1630)
PB6_servo3: Finger3.1 MCU.58 | length 1362
  Top Layer w10: MCU.58 965.47,1794.14 971.33,1800 1179.14,1800 1189.14,1790 v1(1190,1790)
  Bottom Layer w10: v1(1190,1790) 1190,2420 Finger3.1
PB7_servo4: Finger4.1 MCU.59 | length 1088.7
  Top Layer w10: 945.47,1735 945.47,1802.43 963.05,1820 v1(1215,1820)
  Bottom Layer w10: v1(1215,1820) 1215,1900 1600,2285 Finger4.1
PB10_servo2: Finger2.1 MCU.29 | length 1788.2
  Top Layer w10: MCU.29 1083.93,1247 1083.93,1318.93 v1(1085,1320)
  Bottom Layer w10: Finger2.1 845,2650.86 850.86,2645 1120.06,2645 1125.92,2639.14 1125.92,1664.08 1160,1630 1160,1395 v1(1085,1320)
PC1: MCU.9 R1.1 | length 453.3
  Top Layer w8: R1.1 v1(470,1630) ; v1(700,1525) 700,1502 736.11,1465.89 765.92,1465.89 MCU.9
  Layer 2 w8: v1(470,1630) 595,1630 v1(700,1525)
PC2: MCU.10 R0.1 | length 380.2
  Top Layer w8: R0.1 v1(470,1465) ; v1(700,1465) 700,1463.94 718.47,1445.47 MCU.10
  Layer 2 w8: v1(470,1465) v1(700,1465)
PC3: backup.2 MCU.11 | length 766.6
  Top Layer w8: v1(705,1425) 705.79,1425.79 MCU.11
  Layer 2 w8: backup.2 160,1280 225,1215 540,1215 629,1304 653.42,1304 705,1355.58 v1(705,1425)
PC6_USART6_TX: BT.1 MCU.37 | length 641.5
  Top Layer w8: MCU.37 1268.9,1406.1 v1(1295,1380)
  Layer 2 w10: v1(1295,1380) 1755,1380 BT.1
PC7_USART6_RX: BT.2 MCU.38 | length 612.3
  Top Layer w8: MCU.38 1224.08,1425.06 1254.94,1425.06 1255,1425 1305,1425 v1(1325,1405)
  Layer 2 w10: v1(1325,1405) 1820,1405 BT.2
PC13_button: C15.2 MCU.2 R30.1 S0.2 S0.4 | length 1488.1
  Top Layer w8: R30.1 429.92,604.88 498.67,673.63 498.67,750.2 S0.2 S0.4 745.67,807.95 852.05,701.57 C15.2 ; v1(695,1570) 695.06,1570.06 695.06,1585.06 712.95,1602.95 MCU.2
  Layer 2 w8: v1(695,1570) 695.8,1569.2 709.31,1569.2 733.58,1544.92 S0.4
SWCLK: debug.2 MCU.49 | length 1551.4
  Top Layer w10: v1(1080,1635) 1105.52,1635 1142.29,1671.77 1142.29,1703 MCU.49
  Bottom Layer w10: debug.2 163.28,630 632.62,1099.34 660.05,1099.34 1120,1559.29 1120,1595 v1(1080,1635)
SWDIO: debug.3 MCU.46 | length 1425.7
  Top Layer w10: v1(1095,1575) 1164.17,1575 1172.39,1583.22 MCU.46@1220,1583.22
  Bottom Layer w10: debug.3 250,825 330,825 820,1315 847.43,1315 970.26,1437.83 970.26,1450.26 v1(1095,1575)
pads on no net: MCU.3 MCU.4 MCU.5 MCU.6 MCU.8 MCU.16 MCU.17 MCU.20 MCU.24 MCU.25 MCU.28 MCU.33 MCU.34 MCU.35 MCU.36 MCU.39 MCU.40 MCU.51 MCU.52 MCU.53 MCU.54 MCU.56 MCU.57 MCU.61 MCU.62

## Polygon pours and split planes (outlines as drawn)
AGND on Bottom Layer "GND" (solid, pour order 1): 0,3000 2000,3000 2000,0 0,0

## Silkscreen, mask and mechanical layers (free items; w line width, h text height)
Top Overlay:
  drawing of 2 lines, arcs and shapes, not listed
  text "+5V" at 1890,1595 h30
  text "GND" at 1895,1495 h30
  text "RX" at 1895,1395 h30
  text "TX" at 1895,1290 h30
  text "PC3" at 230,1275 h30
  text "PA1" at 230,1170 h30
  text "GND" at 230,1015 h30
  text "PA0" at 230,915 h30
  text "NRST" at 230,815 h30
  text "IO" at 230,720 h30
  text "CLK" at 230,610 h30
  text "BOOT0" at 225,510 h30
  text "Haptic Hands V1.0" at 70,34.99 h60
Mechanical 1:
  the board outline again, w0

## Text inside footprints (layer, text, board x,y; h text height)
Finger0: Top Overlay "8" at 200,2395 h40 r90; Top Overlay "7" at 300,2395 h40 r90; Top Overlay "1" at 300,1945 h40 r90; Top Overlay "2" at 200,1930 h40 r90
Finger1: Top Overlay "8" at 565,2790 h40; Top Overlay "7" at 565,2690 h40; Top Overlay "1" at 115,2690 h40; Top Overlay "2" at 100,2790 h40
Finger2: Top Overlay "7" at 1210,2695 h40; Top Overlay "8" at 1210,2795 h40; Top Overlay "1" at 760,2695 h40; Top Overlay "2" at 745,2795 h40
Finger3: Top Overlay "8" at 1845,2790 h40; Top Overlay "7" at 1845,2690 h40; Top Overlay "1" at 1395,2690 h40; Top Overlay "2" at 1380,2790 h40
Finger4: Top Overlay "2" at 1800,2385 h40 r270; Top Overlay "1" at 1700,2370 h40 r270; Top Overlay "7" at 1700,1920 h40 r270; Top Overlay "8" at 1800,1920 h40 r270